# EAGLE board feedback_driver (EAGLE 7.6.0)
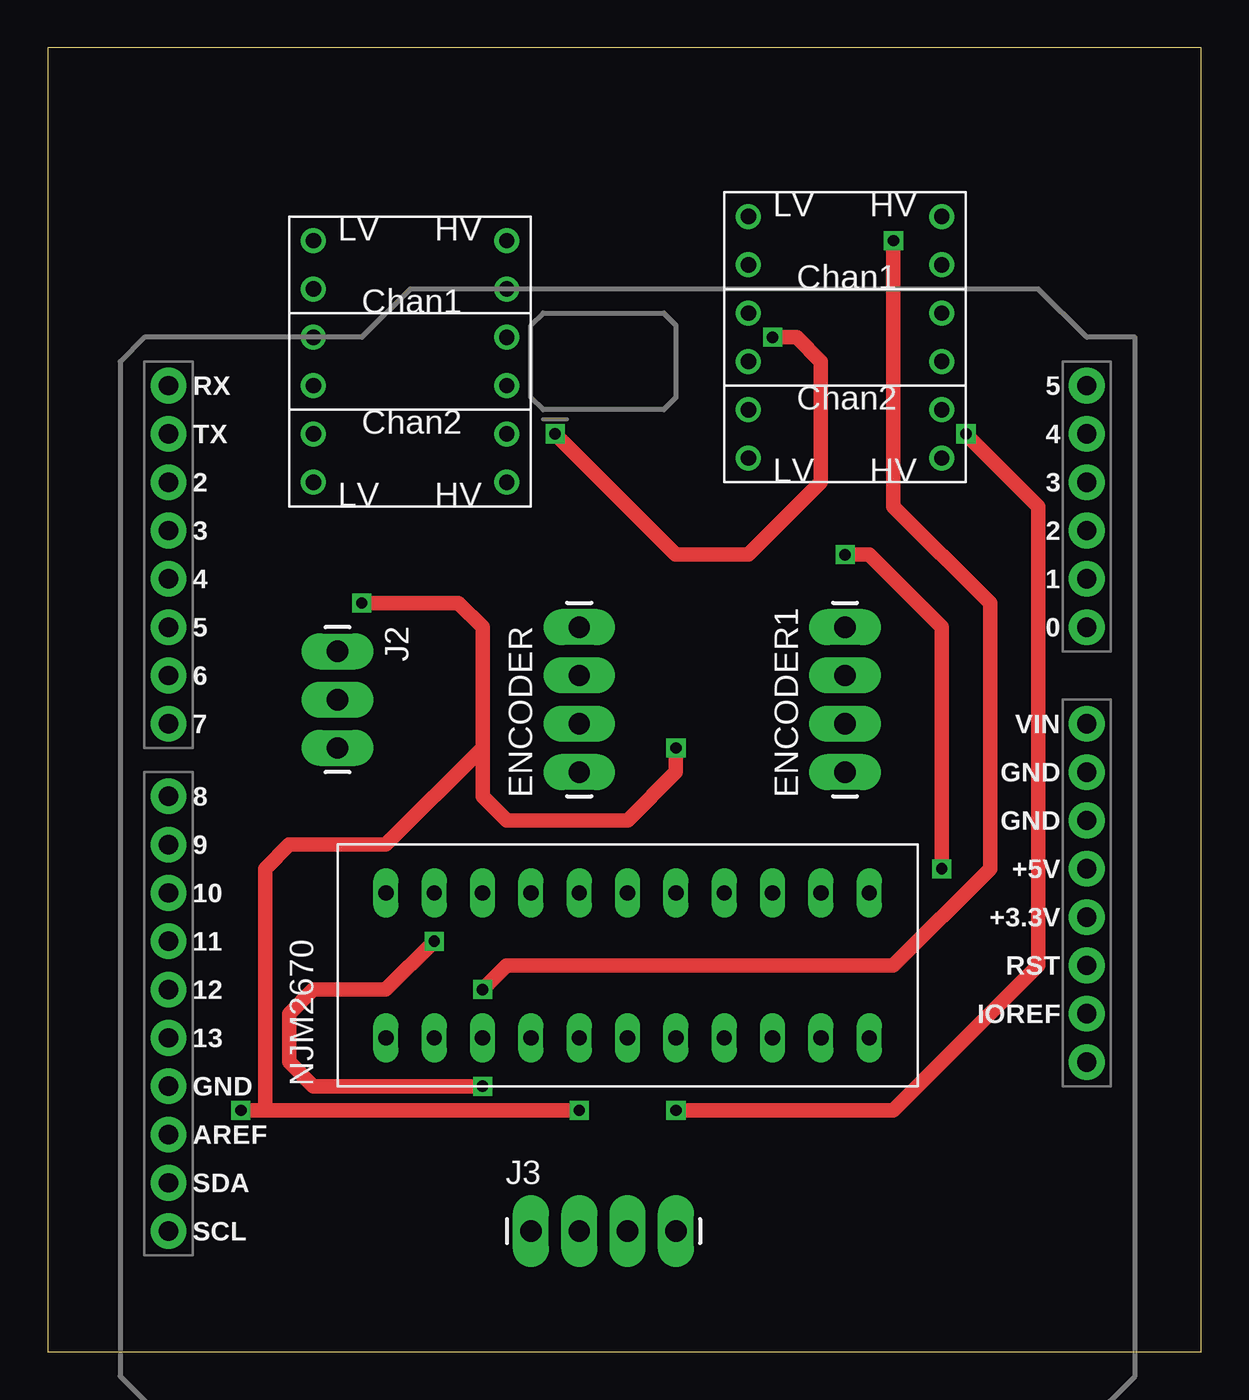
[diagram p0: board, top side]
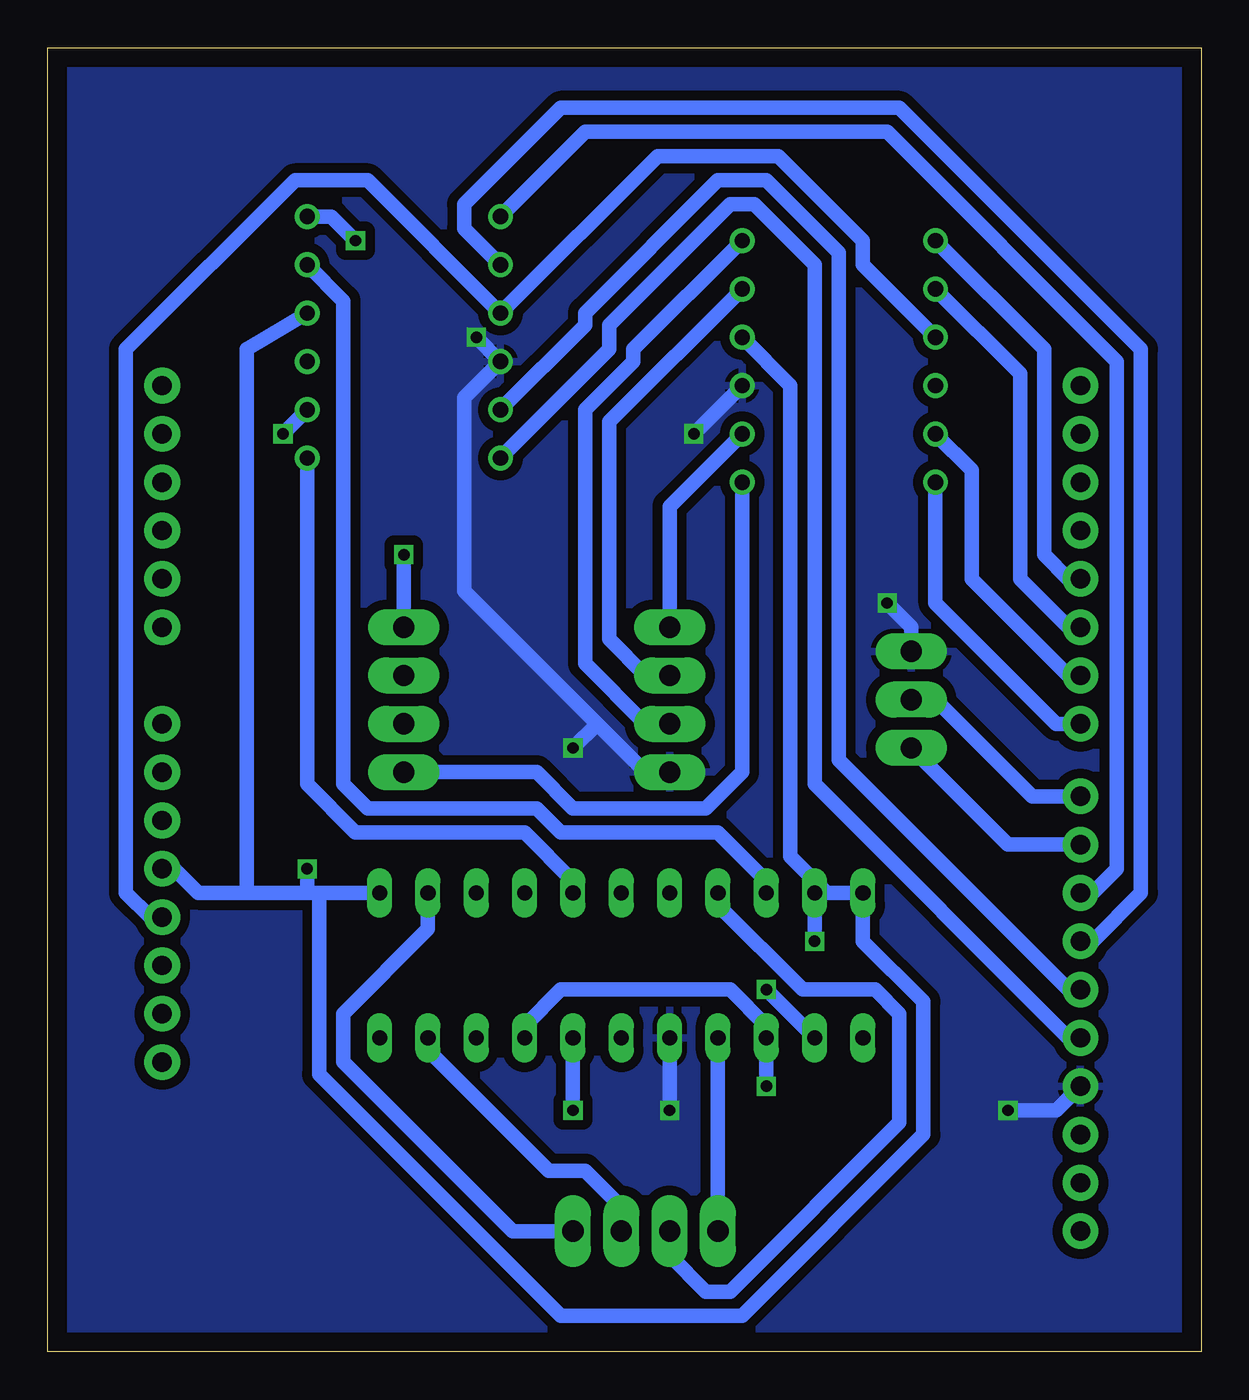
[diagram p1: board, bottom side, seen from below]

Size 60.63 x 68.57 mm. Coordinates in mm from the lower left corner, seen from the top.
Outline: 0,0 60.63,0 60.63,68.57 0,68.57 0,0
Copper layers (1*16): Top 0.035mm / dielectric 1.5mm / Bottom 0.035mm
Design rules "default *": minimum track width 30mil, minimum drill 24mil, track to track 20mil, track to pad 20mil, pad to pad 20mil, via to via 20mil, smd to smd 20mil, copper to edge 40mil, drill to drill 8mil, minimum pad ring 10mil, minimum via ring 8mil, stop-mask expansion 4mil, vias tented up to drill 0mil, thermal gap 10mil

## Footprints (pad centres in the part's own frame; a part is rotated, then mirrored left to right if it is on the bottom)
1X04_LONGPADS = drill 1.118 pad 1.88 long: 1 0,0; 2 2.54,0; 3 5.08,0; 4 7.62,0
UNO_R3_SHIELD = drill 1.016 pad 1.88: 3.3V 50.8,26.67; 5V 50.8,29.21; A0 50.8,41.91; A1 50.8,44.45; A2 50.8,46.99; A3 50.8,49.53; A4 50.8,52.07; A5 50.8,54.61; AREF 2.54,15.24; D2 2.54,49.53; D3 2.54,46.99; D4 2.54,44.45; D5 2.54,41.91; D6 2.54,39.37; D7 2.54,36.83; D8 2.54,33.02; D9 2.54,30.48; D10 2.54,27.94; D11 2.54,25.4; D12 2.54,22.86; D13 2.54,20.32; GND@0 50.8,31.75; GND@1 50.8,34.29; GND@2 2.54,17.78; IOREF 50.8,21.59; NC 50.8,19.05; RES 50.8,24.13; RX 2.54,54.61; SCL 2.54,10.16; SDA 2.54,12.7; TX 2.54,52.07; VIN 50.8,36.83
1X03_LONGPADS = drill 1.118 pad 1.88 long: 1 0,0; 2 2.54,0; 3 5.08,0
LOGIC_LEVEL_CONVERTER = drill 0.8: P$1 1.27,13.97; P$2 1.27,11.43; P$3 1.27,8.89; P$4 1.27,6.35; P$5 1.27,3.81; P$6 1.27,1.27; P$7 11.43,1.27; P$8 11.43,3.81; P$9 11.43,6.35; P$10 11.43,8.89; P$11 11.43,11.43; P$12 11.43,13.97
NJM2670 = drill 0.8 long: EN_A -3.81,7.62; EN_B -3.81,-5.08; GND -3.81,2.54; GND2 -3.81,0; GND3 3.81,0; GND4 3.81,2.54; INA1 -3.81,10.16; INA2 3.81,7.62; INB1 -3.81,-2.54; INB2 3.81,-2.54; NC -3.81,-7.62; NC2 3.81,-7.62; OUTA1 -3.81,5.08; OUTA2 3.81,5.08; OUTB1 -3.81,-10.16; OUTB2 3.81,-10.16; SENSE_A -3.81,12.7; SENSE_B -3.81,-12.7; TSD 3.81,-5.08; VCC 3.81,10.16; VS_A 3.81,12.7; VS_B 3.81,-12.7

## Placement (x,y rotation side)
ENCODER  [1X04_LONGPADS]  27.94,30.48 90 top
ENCODER1  [1X04_LONGPADS]  41.91,30.48 90 top
J1  ARDUINO_R3_SHIELD  [UNO_R3_SHIELD]  3.81,-3.81 0 top
J2  [1X03_LONGPADS]  15.24,36.83 270 top
J3  [1X04_LONGPADS]  25.4,6.35 0 top
U$1  LOGIC_LEVEL_CONVERTER  [LOGIC_LEVEL_CONVERTER]  12.7,44.45 0 top
U$2  LOGIC_LEVEL_CONVERTER  [LOGIC_LEVEL_CONVERTER]  35.56,45.72 0 top
U$3  NJM2670  [NJM2670]  30.48,20.32 90 top

## Library data of the parts
ENCODER ENCODER1 J3 = SparkFun-Connectors; PROD_ID: CONN-09696
J1 U$1 U$2 = SparkFun-Boards
J2 = SparkFun-Connectors
U$3 = NJM2670

## Nets
3V3: J1.3.3V U$1.P$3 U$2.P$3
5V: ENCODER1.4 J1.5V U$1.P$10 U$2.P$10 U$3.EN_A U$3.EN_B U$3.VCC U$3.VS_A U$3.VS_B
A+: ENCODER.2 U$1.P$12
A+L: J1.D4 U$1.P$1
A-: ENCODER.3 U$1.P$11
A-L: J1.D5 U$1.P$2
B+: ENCODER.4 U$1.P$8
B+L: J1.D6 U$1.P$5
B-: ENCODER1.1 U$1.P$7
B-L: J1.D7 U$1.P$6
DIR: J1.D9 J2.3
GND: ENCODER.1 J1.GND@2 J2.1 U$1.P$9 U$2.P$4 U$3.GND
OUTA1: J3.1 U$3.OUTA1
OUTA2: J3.2 U$3.OUTA2
OUTB1: J3.3 U$3.OUTB1
OUTB2: J3.4 U$3.OUTB2
PWM1: J1.D10 U$2.P$1
PWM1_H: U$2.P$12 U$3.INA1
PWM2: J1.D11 U$2.P$2
PWM2_H: U$2.P$11 U$3.INA2
PWM3: J1.D12 U$2.P$5
PWM3_H: U$2.P$8 U$3.INB1
PWM4: J1.D13 U$2.P$6
PWM4_H: U$2.P$7 U$3.INB2
STEP: J1.D8 J2.2
Z+: ENCODER1.2
Z-: ENCODER1.3

## Tracks (layer width: path | path; a pad name or v marks a point on that pad's centre or on a via)
3V3
  Bottom 0.762: U$1.P$3 17.78,57.15 17.78,58.42 22.23,62.87 28.57,62.87 U$2.P$3 43.81,61.59 47.62,61.59 56.52,52.7 56.52,24.13 55.24,22.86 J1.3.3V
5V  (via drill 0.6)
  Top 0.762: v20.32,21.59 17.78,19.05 13.97,19.05 12.7,17.78 12.7,15.24 13.97,13.97 v22.86,13.97 | v41.91,41.91 43.18,41.91 46.99,38.1 v46.99,25.4
  Bottom 0.762: U$3.EN_B 35.56,17.14 33.66,19.05 24.77,19.05 22.86,17.14 U$3.EN_A v22.86,13.97 | 19.68,24.13 U$3.VS_A 17.78,21.59 14.61,18.41 14.61,11.43 24.13,1.91 33.66,1.91 46.35,14.61 46.35,24.13 | U$1.P$10 21.59,50.8 21.59,26.04 19.68,24.13 | 19.68,24.13 U$3.VCC v20.32,21.59 | 50.16,24.13 52.7,24.13 53.98,25.4 J1.5V | 50.16,24.13 46.99,24.13 | 46.99,24.13 46.35,24.13 | 46.35,24.13 U$3.VS_B | U$2.P$10 50.16,52.7 50.16,24.13 | ENCODER1.4 v41.91,41.91 | v46.99,25.4 46.99,24.13
A+
  Bottom 0.762: U$1.P$12 29.84,52.7 29.84,52.07 32.38,49.53 32.38,36.2 29.21,33.02 ENCODER.2
A+L
  Bottom 0.762: U$1.P$1 8.26,52.7 8.26,41.91 6.99,40.64 J1.D4
A-
  Bottom 0.762: U$1.P$11 31.11,48.9 31.11,37.47 29.21,35.56 ENCODER.3
A-L
  Bottom 0.762: U$1.P$2 9.53,51.44 9.53,40.64 6.99,38.1 J1.D5
B+
  Bottom 0.762: U$1.P$8 27.94,44.45 ENCODER.4
B+L
  Bottom 0.762: U$1.P$5 12.06,46.35 12.06,40.64 6.99,35.56 J1.D6
B-
  Bottom 0.762: U$1.P$7 24.13,30.48 26.04,28.57 33.02,28.57 34.92,30.48 ENCODER1.1
B-L
  Bottom 0.762: U$1.P$6 13.97,39.37 7.62,33.02 J1.D7
DIR
  Bottom 0.762: J1.D9 10.16,26.67 J2.3
GND  (via drill 0.6)
  Top 0.762: v38.1,53.34 39.37,53.34 40.64,52.07 40.64,45.72 36.83,41.91 33.02,41.91 v26.67,48.26 | v16.51,39.37 21.59,39.37 22.86,38.1 22.86,31.75 | 22.86,31.75 22.86,29.21 24.13,27.94 30.48,27.94 33.02,30.48 v33.02,31.75 | v27.94,12.7 11.43,12.7 | 11.43,12.7 v10.16,12.7 | 11.43,12.7 11.43,25.4 12.7,26.67 17.78,26.67 22.86,31.75
  Bottom 0.762: 31.75,33.02 29.21,30.48 ENCODER.1 | 31.75,33.02 38.73,40.01 38.73,50.16 U$2.P$4 v38.1,53.34 | v26.67,48.26 U$1.P$9 | J2.1 15.24,38.1 v16.51,39.37 | v33.02,31.75 31.75,33.02 | U$3.GND v27.94,12.7 | v10.16,12.7 7.62,12.7 J1.GND@2
  pour Bottom: 0,0 60.96,0 60.96,68.58 55.88,68.58 0,68.58
OUTA1
  Bottom 0.762: J3.1 U$3.OUTA1
OUTA2
  Bottom 0.762: U$3.OUTA2 25.4,23.5 20.95,19.05 17.14,19.05 15.88,17.78 15.88,12.06 24.77,3.17 26.04,3.17 27.94,5.08 J3.2
OUTB1
  Bottom 0.762: U$3.OUTB1 40.64,15.88 34.29,9.53 32.38,9.53 30.48,7.62 J3.3
OUTB2
  Bottom 0.762: U$3.OUTB2 40.64,22.23 45.09,17.78 45.09,15.24 36.2,6.35 J3.4
PWM1
  Bottom 0.762: U$2.P$1 32.38,64.14 16.51,64.14 4.45,52.07 4.45,25.4 5.71,24.13 J1.D10
PWM1_H  (via drill 0.6)
  Top 0.762: v44.45,58.42 44.45,44.45 49.53,39.37 49.53,25.4 44.45,20.32 24.13,20.32 v22.86,19.05
  Bottom 0.762: U$2.P$12 45.72,59.69 v44.45,58.42 | v22.86,19.05 U$3.INA1
PWM2
  Bottom 0.762: U$2.P$2 38.73,59.05 38.73,60.33 33.66,65.41 15.88,65.41 3.17,52.7 3.17,24.13 5.71,21.59 J1.D11
PWM2_H
  Bottom 0.762: U$3.INA2 22.86,24.77 25.4,27.3 33.66,27.3 34.92,28.57 43.81,28.57 45.09,29.84 45.09,55.24 U$2.P$11
PWM3
  Bottom 0.762: U$2.P$5 32.38,53.98 32.38,54.61 25.4,61.59 22.86,61.59 19.05,57.78 19.05,31.11 6.99,19.05 J1.D12
PWM3_H  (via drill 0.6)
  Top 0.762: v33.02,12.7 44.45,12.7 52.07,20.32 52.07,44.45 v48.26,48.26
  Bottom 0.762: U$3.INB1 v33.02,12.7 | U$2.P$8 v48.26,48.26
PWM4
  Bottom 0.762: U$2.P$6 31.11,52.7 31.11,53.98 24.77,60.33 23.5,60.33 20.32,57.15 20.32,29.84 6.99,16.51 J1.D13
PWM4_H
  Bottom 0.762: U$3.INB2 33.02,24.77 35.56,27.3 44.45,27.3 46.99,29.84 U$2.P$7
STEP
  Bottom 0.762: J1.D8 8.89,29.21 13.97,34.29 J2.2